# Altium PCB qol56-pcb(1).PcbDoc (part 2 of 2)
Units mm, origin at the board's own origin, x right, y up, seen from the top; angles counter-clockwise.
Board outline 272 x 86 mm, 2 copper layers (F.Cu, B.Cu); 180 components, 134 nets, 1209 pads, 192 vias.
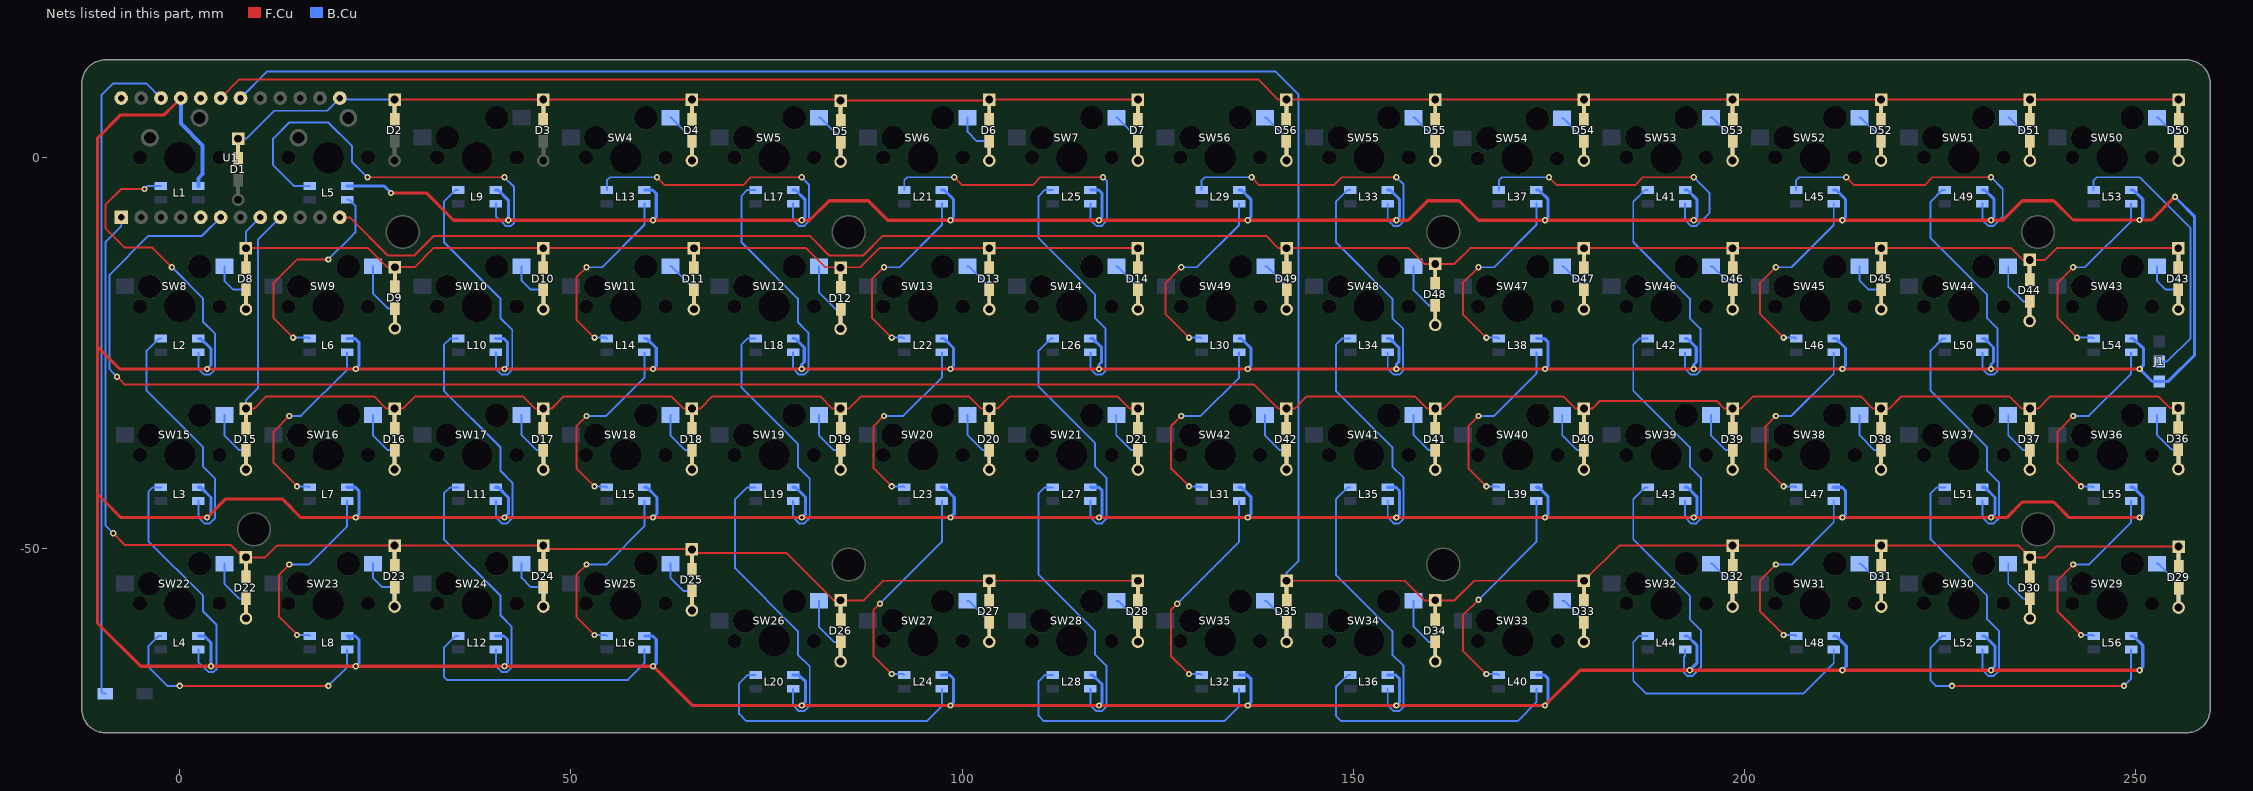
[diagram p2: the nets of this part, all layers, seen from the top]

## Via types
v1: diameter 0.8, hole 0.4, F.Cu to B.Cu, tented both sides, 192 vias

## Nets (pads, with @x,y where several pads share a name; then routed paths per layer and width w, separated by ;. In a path a pad name is that pad's centre, name@x,y a point inside that pad or via, vN(x,y) a via of type N, cw(c..) or ccw(c..) an arc to the next point about the centre after c; other vN are vias at no path point) (continued)
Net-(D4-Pad2): D4.2 SW4.2 | length 4.2
  B.Cu w0.25: SW4.2@62.7,5.12 62.85,5.12 65.47,2.5 D4.2@65.47,2.13
Net-(D5-Pad2): D5.2 SW5.2 | length 4.4
  B.Cu w0.25: SW5.2@81.7,5.12 81.85,5.12 84.47,2.5 D5.2@84.47,2
Net-(D6-Pad2): D6.2 SW6.2 | length 5.1
  B.Cu w0.25: SW6.2@100.7,5.12 100.7,3.3 101.87,2.13 102.62,2.13 D6.2@103.47,2.13
Net-(D7-Pad2): D7.2 SW7.2 | length 4.2
  B.Cu w0.25: SW7.2@119.7,5.12 119.85,5.12 122.47,2.5 D7.2@122.47,2.13
Net-(D8-Pad2): D8.2 SW8.2 | length 5.1
  B.Cu w0.25: SW8.2@5.7,-13.88 5.7,-15.7 6.87,-16.87 7.62,-16.87 D8.2@8.47,-16.87
Net-(D9-Pad2): D9.2 SW9.2 | length 7.1
  B.Cu w0.25: SW9.2@24.7,-13.88 24.7,-17.35 26.65,-19.3 D9.2@27.5,-19.3
Net-(D10-Pad2): D10.2 SW10.2 | length 5.1
  B.Cu w0.25: SW10.2@43.7,-13.88 43.7,-15.7 44.87,-16.87 45.62,-16.87 D10.2@46.47,-16.87
Net-(D11-Pad2): D11.2 SW11.2 | length 4.3
  B.Cu w0.25: SW11.2@62.7,-13.88 62.85,-13.88 65.72,-16.75 D11.2@65.72,-16.87
Net-(D12-Pad2): D12.2 SW12.2 | length 8
  B.Cu w0.25: SW12.2@81.7,-13.88 81.7,-17.2 83.87,-19.37 D12.2@84.47,-19.37 ; D12.2@84.47,-20 D12.2@84.47,-18.97
Net-(D13-Pad2): D13.2 SW13.2 | length 4.2
  B.Cu w0.25: SW13.2@100.7,-13.88 100.85,-13.88 103.47,-16.5 D13.2@103.47,-16.87
Net-(D14-Pad2): D14.2 SW14.2 | length 4.2
  B.Cu w0.25: SW14.2@119.7,-13.88 119.85,-13.88 122.47,-16.5 D14.2@122.47,-16.87
Net-(D15-Pad2): D15.2 SW15.2 | length 6.1
  B.Cu w0.25: SW15.2@5.7,-32.88 5.7,-35.45 7.62,-37.37 D15.2@8.47,-37.37
Net-(D16-Pad2): D16.2 SW16.2 | length 6.1
  B.Cu w0.25: SW16.2@24.7,-32.88 24.7,-35.45 26.62,-37.37 D16.2@27.47,-37.37
Net-(D17-Pad2): D17.2 SW17.2 | length 6.1
  B.Cu w0.25: SW17.2@43.7,-32.88 43.7,-35.45 45.62,-37.37 D17.2@46.47,-37.37
Net-(D18-Pad2): D18.2 SW18.2 | length 6.1
  B.Cu w0.25: SW18.2@62.7,-32.88 62.7,-35.45 64.62,-37.37 D18.2@65.47,-37.37
Net-(D19-Pad2): D19.2 SW19.2 | length 6.1
  B.Cu w0.25: SW19.2@81.7,-32.88 81.7,-35.45 83.62,-37.37 D19.2@84.47,-37.37
Net-(D20-Pad2): D20.2 SW20.2 | length 6.1
  B.Cu w0.25: SW20.2@100.7,-32.88 100.7,-35.45 102.62,-37.37 D20.2@103.47,-37.37
Net-(D21-Pad2): D21.2 SW21.2 | length 6.1
  B.Cu w0.25: SW21.2@119.7,-32.88 119.7,-35.45 121.62,-37.37 D21.2@122.47,-37.37
Net-(D22-Pad2): D22.2 SW22.2 | length 6.1
  B.Cu w0.25: SW22.2@5.7,-51.88 5.7,-54.45 7.62,-56.37 D22.2@8.47,-56.37
Net-(D23-Pad2): D23.2 SW23.2 | length 5.1
  B.Cu w0.25: SW23.2@24.7,-51.88 24.7,-53.7 25.87,-54.87 D23.2@27.47,-54.87
Net-(D24-Pad2): D24.2 SW24.2 | length 5.1
  B.Cu w0.25: SW24.2@43.7,-51.88 43.7,-53.7 44.87,-54.87 D24.2@46.47,-54.87
Net-(D25-Pad2): D25.2 SW25.2 | length 5.3
  B.Cu w0.25: SW25.2@62.7,-51.88 62.7,-53.7 64.37,-55.37 D25.2@65.47,-55.37
Net-(D26-Pad2): D26.2 SW26.2 | length 6.9
  B.Cu w0.25: SW26.2@81.7,-56.63 81.7,-59.95 83.62,-61.87 D26.2@84.47,-61.87
Net-(D27-Pad2): D27.2 SW27.2 | length 4
  B.Cu w0.25: SW27.2@100.7,-56.63 100.85,-56.63 103.47,-59.25 D27.2@103.47,-59.37
Net-(D28-Pad2): D28.2 SW28.2 | length 4
  B.Cu w0.25: SW28.2@119.7,-56.63 119.93,-56.63 122.47,-59.17 D28.2@122.47,-59.37
Net-(D29-Pad2): D29.2 SW29.2 | length 4.4
  B.Cu w0.25: SW29.2@252.7,-51.88 252.85,-51.88 255.47,-54.5 D29.2@255.47,-55
Net-(D30-Pad2): D30.2 SW30.2 | length 6.1
  B.Cu w0.25: SW30.2@233.7,-51.88 233.7,-54.45 235.62,-56.37 D30.2@236.47,-56.37
Net-(D31-Pad2): D31.2 SW31.2 | length 4.2
  B.Cu w0.25: SW31.2@214.7,-51.88 214.85,-51.88 217.47,-54.5 D31.2@217.47,-54.87
Net-(D32-Pad2): D32.2 SW32.2 | length 4.2
  B.Cu w0.25: SW32.2@195.7,-51.88 195.85,-51.88 198.47,-54.5 D32.2@198.47,-54.87
Net-(D33-Pad2): D33.2 SW33.2 | length 4
  B.Cu w0.25: SW33.2@176.7,-56.63 176.93,-56.63 179.47,-59.17 D33.2@179.47,-59.37
Net-(D34-Pad2): D34.2 SW34.2 | length 6.9
  B.Cu w0.25: SW34.2@157.7,-56.63 157.7,-59.95 159.62,-61.87 D34.2@160.47,-61.87
Net-(D35-Pad2): D35.2 SW35.2 | length 5.1
  B.Cu w0.25: SW35.2@138.7,-56.63 138.85,-56.63 141.47,-59.25 D35.2@141.47,-60.47
Net-(D36-Pad2): D36.2 SW36.2 | length 6.1
  B.Cu w0.25: SW36.2@252.7,-32.88 252.7,-35.41 254.59,-37.3 D36.2@255.44,-37.3
Net-(D37-Pad2): D37.2 SW37.2 | length 6.1
  B.Cu w0.25: SW37.2@233.7,-32.88 233.7,-35.45 235.62,-37.37 D37.2@236.47,-37.37
Net-(D38-Pad2): D38.2 SW38.2 | length 6.1
  B.Cu w0.25: SW38.2@214.7,-32.88 214.7,-35.479 216.59,-37.37 D38.2@217.44,-37.37
Net-(D39-Pad2): D39.2 SW39.2 | length 6.1
  B.Cu w0.25: SW39.2@195.7,-32.88 195.7,-35.45 197.62,-37.37 D39.2@198.47,-37.37
Net-(D40-Pad2): D40.2 SW40.2 | length 6.1
  B.Cu w0.25: SW40.2@176.7,-32.88 176.7,-35.45 178.62,-37.37 D40.2@179.47,-37.37
Net-(D41-Pad2): D41.2 SW41.2 | length 6.1
  B.Cu w0.25: SW41.2@157.7,-32.88 157.7,-35.45 159.62,-37.37 D41.2@160.47,-37.37
Net-(D42-Pad2): D42.2 SW42.2 | length 6.1
  B.Cu w0.25: SW42.2@138.7,-32.88 138.7,-35.479 140.59,-37.37 D42.2@141.44,-37.37
Net-(D43-Pad2): D43.2 SW43.2 | length 5.1
  B.Cu w0.25: SW43.2@252.7,-13.88 252.7,-15.729 253.84,-16.87 254.59,-16.87 D43.2@255.44,-16.87
Net-(D44-Pad2): D44.2 SW44.2 | length 6.1
  B.Cu w0.25: SW44.2@233.7,-13.88 233.7,-16.479 235.59,-18.37 D44.2@236.44,-18.37
Net-(D45-Pad2): D45.2 SW45.2 | length 5.1
  B.Cu w0.25: SW45.2@214.7,-13.88 214.7,-15.7 215.87,-16.87 216.62,-16.87 D45.2@217.47,-16.87
Net-(D46-Pad2): D46.2 SW46.2 | length 4.2
  B.Cu w0.25: SW46.2@195.7,-13.88 195.85,-13.88 198.47,-16.5 D46.2@198.47,-16.87
Net-(D47-Pad2): D47.2 SW47.2 | length 4.2
  B.Cu w0.25: SW47.2@176.7,-13.88 176.85,-13.88 179.47,-16.5 D47.2@179.47,-16.87
Net-(D48-Pad2): D48.2 SW48.2 | length 6.6
  B.Cu w0.25: SW48.2@157.7,-13.88 157.7,-16.95 159.62,-18.87 D48.2@160.47,-18.87
Net-(D49-Pad2): D49.2 SW49.2 | length 4.2
  B.Cu w0.25: SW49.2@138.78,-13.88 138.93,-13.88 141.47,-16.42 D49.2@141.47,-16.87
Net-(D50-Pad2): D50.2 SW50.2 | length 4.2
  B.Cu w0.25: SW50.2@252.7,5.12 252.85,5.12 255.47,2.5 D50.2@255.47,2.13
Net-(D51-Pad2): D51.2 SW51.2 | length 4.2
  B.Cu w0.25: SW51.2@233.7,5.12 233.85,5.12 236.47,2.5 D51.2@236.47,2.13
Net-(D52-Pad2): D52.2 SW52.2 | length 4.2
  B.Cu w0.25: SW52.2@214.7,5.12 214.85,5.12 217.44,2.53 D52.2@217.44,2.13
Net-(D53-Pad2): D53.2 SW53.2 | length 4.2
  B.Cu w0.25: SW53.2@195.7,5.12 195.85,5.12 198.47,2.5 D53.2@198.47,2.13
Net-(D54-Pad2): D54.2 SW54.2 | length 4.2
  B.Cu w0.25: SW54.2@176.66,5.04 176.81,5.04 179.47,2.38 D54.2@179.47,2.13
Net-(D55-Pad2): D55.2 SW55.2 | length 4.2
  B.Cu w0.25: SW55.2@157.7,5.12 157.85,5.12 160.47,2.5 D55.2@160.47,2.13
Net-(D56-Pad2): D56.2 SW56.2 | length 4.2
  B.Cu w0.25: SW56.2@138.7,5.12 138.85,5.12 141.44,2.53 D56.2@141.44,2.13
Net-(J1-Pad2): J1.2 L53.1 | length 35.8
  B.Cu w0.25: L53.1@244.6,-4.125 244.6,-2.9 245,-2.5 250.5,-2.5 257,-9 257,-23.052 254.012,-26.04 J1.2@253,-26.04
Net-(L1-Pad1): L1.1 L2.3 | length 41.8
  F.Cu w0.25: v1(-4.5,-4) -7.5,-4 -9.5,-6 -9.5,-9 -7,-11.5 -3.5,-11.5 v1(-1,-14)
  B.Cu w0.25: v1(-4.5,-4) -4.125,-3.625 L1.1@-2.4,-3.625 ; v1(-1,-14) -0.6,-14.4 3,-18 3,-21 4.525,-22.525 4.525,-27.048 3.848,-27.725 3.152,-27.725 2.4,-26.973 L2.3@2.4,-24.875
Net-(L2-Pad1): L2.1 L3.3 | length 32.3
  B.Cu w0.25: L2.1@-2.4,-23.125 -2.7,-23.125 -4.225,-24.65 -4.225,-29.775 3,-37 3,-39.5 4.525,-41.025 4.525,-46.048 3.848,-46.725 3.152,-46.725 2.4,-45.973 2.4,-44.625 L3.3@2.4,-43.875
Net-(L3-Pad1): L3.1 L4.3 | length 32.7
  B.Cu w0.25: L3.1@-2.4,-42.125 -3.45,-42.125 -4,-42.675 -4,-49 3,-56 3,-58 4.725,-59.725 4.725,-65.348 4.348,-65.725 3.652,-65.725 2.4,-64.473 L4.3@2.4,-62.875
Net-(L4-Pad1): L4.1 L8.3 | length 34.4
  F.Cu w0.25: v1(0,-67.5) v1(19,-67.5)
  B.Cu w0.25: L4.1@-2.4,-61.125 -2.7,-61.125 -4,-62.425 -4,-65.073 -1.573,-67.5 v1(0,-67.5) ; v1(19,-67.5) 21.4,-65.1 L8.3@21.4,-62.875
Net-(L5-Pad1): L5.1 L9.3 | length 54.6
  F.Cu w0.25: v1(24,-2.5) 35,-2.5 v1(41.5,-2.5)
  B.Cu w0.25: L5.1@16.6,-3.625 14.625,-3.625 11.95,-0.95 11.95,2.45 14,4.5 19,4.5 22,1.5 22,-0.5 v1(24,-2.5) ; L9.3@40.4,-5.875 40.4,-7.473 41.652,-8.725 42.348,-8.725 42.725,-8.348 42.725,-3.725 v1(41.5,-2.5)
Net-(L5-Pad3): L5.3 L6.1 | length 28.1
  F.Cu w0.25: v1(14.5,-23) 12,-20.5 12,-16 15,-13 v1(19,-13)
  B.Cu w0.25: v1(14.5,-23) 16.475,-23 L6.1@16.6,-23.125 ; v1(19,-13) 21.671,-10.329 22.45,-9.55 22.45,-6.125 21.7,-5.375 L5.3@21.4,-5.375
Net-(L6-Pad3): L6.3 L7.1 | length 24.8
  F.Cu w0.25: v1(14,-33) 12,-35 12,-39 v1(15,-42)
  B.Cu w0.25: v1(14,-33) 15.5,-33 21.4,-27.1 L6.3@21.4,-24.875 ; v1(15,-42) 16.475,-42 L7.1@16.6,-42.125
Net-(L7-Pad3): L7.3 L8.1 | length 24.8
  F.Cu w0.25: v1(14,-52) 12.695,-53.305 12.695,-58.695 v1(15,-61)
  B.Cu w0.25: v1(14,-52) 16.5,-52 21.4,-47.1 L7.3@21.4,-43.875 ; v1(15,-61) 16.475,-61 L8.1@16.6,-61.125
Net-(L10-Pad1): L10.1 L11.3 | length 32.7
  B.Cu w0.25: L10.1@35.6,-23.125 34.55,-23.125 33.775,-23.9 33.775,-29.775 41,-37 41,-40 42.525,-41.525 42.525,-46.048 41.848,-46.725 41.152,-46.725 40.4,-45.973 40.4,-44.625 L11.3@40.4,-43.875
Net-(L10-Pad3): L9.1 L10.3 | length 32.3
  B.Cu w0.25: L9.1@35.6,-4.125 35.3,-4.125 33.775,-5.65 33.775,-10.775 41,-18 41,-20.5 42.5,-22 42.5,-27.073 41.848,-27.725 41.152,-27.725 40.4,-26.973 40.4,-25.625 L10.3@40.4,-24.875
Net-(L11-Pad1): L11.1 L12.3 | length 32.7
  B.Cu w0.25: L11.1@35.6,-42.125 34.55,-42.125 33.775,-42.9 33.775,-48.775 41,-56 41,-58.5 42.425,-59.925 42.425,-65.148 41.848,-65.725 41.152,-65.725 40.4,-64.973 L12.3@40.4,-62.875
Net-(L12-Pad1): L12.1 L16.3 | length 34.5
  B.Cu w0.25: L12.1@35.6,-61.125 35.3,-61.125 33.775,-62.65 33.775,-66.348 34.152,-66.725 57.275,-66.725 59.4,-64.6 L16.3@59.4,-62.875
Net-(L13-Pad1): L13.1 L17.3 | length 37.8
  F.Cu w0.25: v1(61,-2.5) 62,-3.5 72,-3.5 73,-2.5 v1(79.5,-2.5)
  B.Cu w0.25: L13.1@54.6,-4.125 54.6,-2.9 55,-2.5 v1(61,-2.5) ; L17.3@78.4,-5.875 78.4,-6.625 78.4,-7.973 79.152,-8.725 79.848,-8.725 80.425,-8.148 80.425,-3.425 v1(79.5,-2.5)
Net-(L13-Pad3): L13.3 L14.1 | length 24.5
  F.Cu w0.25: v1(52,-14) 50.695,-15.305 50.695,-20.695 v1(53,-23)
  B.Cu w0.25: v1(52,-14) 54,-14 59.4,-8.6 L13.3@59.4,-5.875 ; v1(53,-23) 54.475,-23 L14.1@54.6,-23.125
Net-(L14-Pad3): L14.3 L15.1 | length 24.8
  F.Cu w0.25: v1(52,-33) 50.695,-34.305 50.695,-39.695 v1(53,-42)
  B.Cu w0.25: v1(52,-33) 54.5,-33 59.4,-28.1 L14.3@59.4,-24.875 ; v1(53,-42) 54.475,-42 L15.1@54.6,-42.125
Net-(L15-Pad3): L15.3 L16.1 | length 24.8
  F.Cu w0.25: v1(52,-52) 50.695,-53.305 50.695,-58.695 v1(53,-61)
  B.Cu w0.25: v1(52,-52) 54.5,-52 59.4,-47.1 L15.3@59.4,-43.875 ; v1(53,-61) 54.475,-61 L16.1@54.6,-61.125
Net-(L17-Pad1): L17.1 L18.3 | length 32.6
  B.Cu w0.25: L17.1@73.6,-4.125 72.55,-4.125 71.775,-4.9 71.775,-10.775 79,-18 79,-21 80.35,-22.35 80.35,-27.223 79.848,-27.725 79.152,-27.725 78.4,-26.973 78.4,-25.625 L18.3@78.4,-24.875
Net-(L18-Pad1): L18.1 L19.3 | length 32.7
  B.Cu w0.25: L18.1@73.6,-23.125 72.55,-23.125 71.775,-23.9 71.775,-29.332 79,-36.557 79,-39.5 80.525,-41.025 80.525,-46.048 79.848,-46.725 79.152,-46.725 78.4,-45.973 78.4,-44.625 L19.3@78.4,-43.875
Net-(L19-Pad1): L19.1 L20.3 | length 38.4
  B.Cu w0.25: L19.1@73.6,-42.125 72.55,-42.125 71,-43.675 71,-52.5 79,-60.5 79,-63.5 80.525,-65.025 80.525,-70.048 79.848,-70.725 79.152,-70.725 78.4,-69.973 L20.3@78.4,-67.875
Net-(L20-Pad1): L20.1 L24.3 | length 35.7
  B.Cu w0.25: L20.1@73.6,-66.125 72.55,-66.125 71.5,-67.175 71.5,-71.073 72.427,-72 95.5,-72 97.4,-70.1 L24.3@97.4,-67.875
Net-(L21-Pad1): L21.1 L25.3 | length 38.2
  F.Cu w0.25: v1(99,-2.5) 100,-3.5 109,-3.5 110,-2.5 v1(118,-2.5)
  B.Cu w0.25: L21.1@92.6,-4.125 92.6,-2.9 93,-2.5 v1(99,-2.5) ; L25.3@116.4,-5.875 116.4,-7.973 117.152,-8.725 117.848,-8.725 118.5,-8.073 118.5,-3 118.4,-2.9 v1(118,-2.5)
Net-(L21-Pad3): L21.3 L22.1 | length 24.7
  F.Cu w0.25: v1(90,-14) 88.5,-15.5 88.5,-20.5 v1(91,-23)
  B.Cu w0.25: v1(90,-14) 92,-14 97.4,-8.6 L21.3@97.4,-5.875 ; v1(91,-23) 92.475,-23 L22.1@92.6,-23.125
Net-(L22-Pad3): L22.3 L23.1 | length 24.8
  F.Cu w0.25: v1(90,-33) 88.695,-34.305 88.695,-39.695 v1(91,-42)
  B.Cu w0.25: v1(90,-33) 92.5,-33 97.4,-28.1 L22.3@97.4,-24.875 ; v1(91,-42) 92.475,-42 L23.1@92.6,-42.125
Net-(L23-Pad3): L23.3 L24.1 | length 28.3
  F.Cu w0.25: v1(89.5,-57) 88.695,-57.805 88.695,-63.695 v1(91,-66)
  B.Cu w0.25: v1(89.5,-57) 97.4,-49.1 L23.3@97.4,-43.875 ; v1(91,-66) 92.475,-66 L24.1@92.6,-66.125
Net-(L25-Pad1): L25.1 L26.3 | length 32.6
  B.Cu w0.25: L25.1@111.6,-4.125 110.55,-4.125 109.775,-4.9 109.775,-10.275 117,-17.5 117,-20.5 118.35,-21.85 118.35,-27.223 117.848,-27.725 117.152,-27.725 116.4,-26.973 116.4,-25.625 L26.3@116.4,-24.875
Net-(L26-Pad1): L26.1 L27.3 | length 32.2
  B.Cu w0.25: L26.1@111.6,-23.125 111.3,-23.125 109.775,-24.65 109.775,-29.275 117,-36.5 117,-39.5 118.425,-40.925 118.425,-46.148 117.848,-46.725 117.152,-46.725 116.4,-45.973 116.4,-44.625 L27.3@116.4,-43.875
Net-(L27-Pad1): L27.1 L28.3 | length 37.7
  B.Cu w0.25: L27.1@111.6,-42.125 110.55,-42.125 109.775,-42.9 109.775,-53.275 117,-60.5 117,-63.5 118.425,-64.925 118.425,-70.148 117.848,-70.725 117.152,-70.725 116.4,-69.973 116.4,-68.625 L28.3@116.4,-67.875
Net-(L28-Pad1): L28.1 L32.3 | length 35.5
  B.Cu w0.25: L28.1@111.6,-66.125 110.55,-66.125 109.775,-66.9 109.775,-71.348 110.427,-72 133.5,-72 135.4,-70.1 L32.3@135.4,-67.875
Net-(L29-Pad1): L29.1 L33.3 | length 37.8
  F.Cu w0.25: v1(137,-2.5) 138,-3.5 147.5,-3.5 148.5,-2.5 v1(155.5,-2.5)
  B.Cu w0.25: L29.1@130.6,-4.125 130.6,-2.9 131,-2.5 v1(137,-2.5) ; L33.3@154.4,-5.875 154.4,-6.625 154.4,-7.973 155.152,-8.725 155.848,-8.725 156.425,-8.148 156.425,-3.425 v1(155.5,-2.5)
Net-(L29-Pad3): L29.3 L30.1 | length 25.1
  F.Cu w0.25: v1(128,-14) 126,-16 126,-20 v1(129,-23)
  B.Cu w0.25: v1(128,-14) 130,-14 135.4,-8.6 L29.3@135.4,-5.875 ; v1(129,-23) 130.475,-23 L30.1@130.6,-23.125
Net-(L30-Pad3): L30.3 L31.1 | length 24.8
  F.Cu w0.25: v1(128,-33) 126.695,-34.305 126.695,-39.695 v1(129,-42)
  B.Cu w0.25: v1(128,-33) 130.5,-33 135.4,-28.1 L30.3@135.4,-24.875 ; v1(129,-42) 130.475,-42 L31.1@130.6,-42.125
Net-(L31-Pad3): L31.3 L32.1 | length 28.3
  F.Cu w0.25: v1(127.5,-57) 126.695,-57.805 126.695,-63.695 v1(129,-66)
  B.Cu w0.25: v1(127.5,-57) 135.4,-49.1 L31.3@135.4,-43.875 ; v1(129,-66) 130.475,-66 L32.1@130.6,-66.125
Net-(L33-Pad1): L33.1 L34.3 | length 32.1
  B.Cu w0.25: L33.1@149.6,-4.125 149.3,-4.125 147.775,-5.65 147.775,-10.775 155,-18 155,-20.5 156.35,-21.85 156.35,-27.223 155.848,-27.725 155.152,-27.725 154.4,-26.973 154.4,-25.625 L34.3@154.4,-24.875
Net-(L34-Pad1): L34.1 L35.3 | length 32.7
  B.Cu w0.25: L34.1@149.6,-23.125 148.55,-23.125 147.775,-23.9 147.775,-29.775 155,-37 155,-39.5 156.425,-40.925 156.425,-46.148 155.848,-46.725 155.152,-46.725 154.4,-45.973 154.4,-44.625 L35.3@154.4,-43.875
Net-(L35-Pad1): L35.1 L36.3 | length 37.2
  B.Cu w0.25: L35.1@149.6,-42.125 149.3,-42.125 147.775,-43.65 147.775,-53.275 155,-60.5 155,-63.5 156.425,-64.925 156.425,-70.148 155.848,-70.725 155.152,-70.725 154.4,-69.973 154.4,-68.625 L36.3@154.4,-67.875
Net-(L36-Pad1): L36.1 L40.3 | length 34.8
  B.Cu w0.25: L36.1@149.6,-66.125 149.3,-66.125 147.775,-67.65 147.775,-71.348 148.427,-72 171,-72 173.4,-69.6 L40.3@173.4,-67.875
Net-(L37-Pad1): L37.1 L41.3 | length 38.7
  F.Cu w0.25: v1(175,-2.5) 176,-3.5 186,-3.5 187,-2.5 v1(193.5,-2.5)
  B.Cu w0.25: L37.1@168.6,-4.125 168.6,-2.9 169,-2.5 v1(175,-2.5) ; L41.3@192.4,-5.875 192.4,-6.625 192.4,-7.973 193.152,-8.725 193.848,-8.725 195.5,-7.073 195.5,-4.5 v1(193.5,-2.5)
Net-(L37-Pad3): L37.3 L38.1 | length 25.1
  F.Cu w0.25: v1(166,-14) 164,-16 164,-20 v1(167,-23)
  B.Cu w0.25: v1(166,-14) 168,-14 173.4,-8.6 L37.3@173.4,-5.875 ; v1(167,-23) 168.475,-23 L38.1@168.6,-23.125
Net-(L38-Pad3): L38.3 L39.1 | length 24.5
  F.Cu w0.25: v1(166,-33) 164.695,-34.305 164.695,-39.695 v1(167,-42)
  B.Cu w0.25: v1(166,-33) 168,-33 173.4,-27.6 L38.3@173.4,-24.875 ; v1(167,-42) 168.475,-42 L39.1@168.6,-42.125
Net-(L39-Pad3): L39.3 L40.1 | length 28.9
  F.Cu w0.25: v1(166,-56.5) 164,-58.5 164,-63 v1(167,-66)
  B.Cu w0.25: v1(166,-56.5) 173.4,-49.1 L39.3@173.4,-43.875 ; v1(167,-66) 168.475,-66 L40.1@168.6,-66.125
Net-(L41-Pad1): L41.1 L42.3 | length 32.1
  B.Cu w0.25: L41.1@187.6,-4.125 187.3,-4.125 185.775,-5.65 185.775,-10.775 193,-18 193,-20.5 194.35,-21.85 194.35,-27.223 193.848,-27.725 193.152,-27.725 192.4,-26.973 192.4,-25.625 L42.3@192.4,-24.875
Net-(L42-Pad1): L42.1 L43.3 | length 32.7
  B.Cu w0.25: L42.1@187.6,-23.125 186.55,-23.125 185.775,-23.9 185.775,-29.775 193,-37 193,-39.5 194.425,-40.925 194.425,-46.148 193.848,-46.725 193.152,-46.725 192.4,-45.973 192.4,-44.625 L43.3@192.4,-43.875
Net-(L43-Pad1): L43.1 L44.3 | length 33.3
  B.Cu w0.25: L43.1@187.6,-42.125 187.3,-42.125 185.775,-43.65 185.775,-48.775 193,-56 193,-59 194.425,-60.425 194.425,-65.148 193.348,-66.225 192.652,-66.225 192.275,-65.848 192.275,-63.75 192.4,-63.625 L44.3@192.4,-62.875
Net-(L44-Pad1): L44.1 L48.3 | length 36.7
  B.Cu w0.25: L44.1@187.6,-61.125 186.55,-61.125 185.775,-61.9 185.775,-66.848 187.427,-68.5 207.5,-68.5 211.4,-64.6 L48.3@211.4,-62.875
Net-(L45-Pad1): L45.1 L49.3 | length 38.3
  F.Cu w0.25: v1(213,-2.5) 214,-3.5 223,-3.5 224,-2.5 v1(231.5,-2.5)
  B.Cu w0.25: L45.1@206.6,-4.125 206.6,-2.9 207,-2.5 v1(213,-2.5) ; L49.3@230.4,-5.875 230.4,-6.625 230.4,-7.973 231.152,-8.725 231.848,-8.725 233,-7.573 233,-4 v1(231.5,-2.5)
Net-(L45-Pad3): L45.3 L46.1 | length 25.1
  F.Cu w0.25: v1(204,-14) 202,-16 202,-20 v1(205,-23)
  B.Cu w0.25: v1(204,-14) 206,-14 211.4,-8.6 L45.3@211.4,-5.875 ; v1(205,-23) 206.475,-23 L46.1@206.6,-23.125
Net-(L46-Pad3): L46.3 L47.1 | length 24.5
  F.Cu w0.25: v1(204,-33) 202.695,-34.305 202.695,-39.695 v1(205,-42)
  B.Cu w0.25: v1(204,-33) 206,-33 211.4,-27.6 L46.3@211.4,-24.875 ; v1(205,-42) 206.475,-42 L47.1@206.6,-42.125
Net-(L47-Pad3): L47.3 L48.1 | length 25.1
  F.Cu w0.25: v1(204,-52) 202,-54 202,-58 v1(205,-61)
  B.Cu w0.25: v1(204,-52) 206,-52 211.4,-46.6 L47.3@211.4,-43.875 ; v1(205,-61) 206.475,-61 L48.1@206.6,-61.125
Net-(L49-Pad1): L49.1 L50.3 | length 32.1
  B.Cu w0.25: L49.1@225.6,-4.125 225.3,-4.125 223.775,-5.65 223.775,-10.275 231,-17.5 231,-20.5 232.35,-21.85 232.35,-27.223 231.848,-27.725 231.152,-27.725 230.4,-26.973 L50.3@230.4,-24.875
Net-(L50-Pad1): L50.1 L51.3 | length 32.3
  B.Cu w0.25: L50.1@225.6,-23.125 225.3,-23.125 223.775,-24.65 223.775,-29.775 231,-37 231,-40 232.525,-41.525 232.525,-46.048 231.848,-46.725 231.152,-46.725 230.4,-45.973 230.4,-44.625 L51.3@230.4,-43.875
Net-(L51-Pad1): L51.1 L52.3 | length 33.7
  B.Cu w0.25: L51.1@225.6,-42.125 224.55,-42.125 223.775,-42.9 223.775,-48.775 231,-56 231,-59 232.525,-60.525 232.525,-65.548 231.848,-66.225 231.152,-66.225 230.4,-65.473 230.4,-63.625 L52.3@230.4,-62.875
Net-(L52-Pad1): L52.1 L56.3 | length 36.6
  F.Cu w0.25: v1(226.5,-67.5) v1(248.5,-67.5)
  B.Cu w0.25: L52.1@225.6,-61.125 225.3,-61.125 223.775,-62.65 223.775,-66.848 224.427,-67.5 v1(226.5,-67.5) ; v1(248.5,-67.5) 249.4,-66.6 L56.3@249.4,-62.875
Net-(L53-Pad3): L53.3 L54.1 | length 25.1
  F.Cu w0.25: v1(242,-14) 241.6,-14.4 240,-16 240,-20.5 v1(242.5,-23)
  B.Cu w0.25: v1(242,-14) 243.5,-14 249.4,-8.1 L53.3@249.4,-5.875 ; v1(242.5,-23) 244.475,-23 L54.1@244.6,-23.125
Net-(L54-Pad3): L54.3 L55.1 | length 25.1
  F.Cu w0.25: v1(242,-33) 240,-35 240,-39 v1(243,-42)
  B.Cu w0.25: v1(242,-33) 244,-33 249.4,-27.6 L54.3@249.4,-24.875 ; v1(243,-42) 244.475,-42 L55.1@244.6,-42.125
Net-(L55-Pad3): L55.3 L56.1 | length 25.1
  F.Cu w0.25: v1(242,-52) 240,-54 240,-58 v1(243,-61)
  B.Cu w0.25: v1(242,-52) 244,-52 249.4,-46.6 L55.3@249.4,-43.875 ; v1(243,-61) 244.475,-61 L56.1@244.6,-61.125
Net-(U1-Pad5): U1.5 | length 0.2
  F.Cu w0.25: U1.5@2.54,-7.47 U1.5@2.69,-7.62
Net-(U1-Pad20): U1.20
Net-(U1-Pad24): U1.24
reset: SW57.1 U1.22 | length 85.9
  B.Cu w0.25: SW57.1@-9.5,-68.5 -9.75,-68.5 -10,-68.25 -10,8 -8.5,9.5 -4.27,9.5 U1.22@-2.39,7.62
row0: D1.1 D2.1 D3.1 D4.1 D5.1 D6.1 D7.1 U1.13 | length 117.3
  F.Cu w0.25: D2.1@27.47,7.43 28.47,7.43 D3.1@46.47,7.43 D4.1@65.47,7.43 84.34,7.43 D5.1@84.47,7.3 103.34,7.3 D6.1@103.47,7.43 D7.1@122.47,7.43
  B.Cu w0.25: D1.1@7.47,2.43 8.52,2.43 12.09,6 18.85,6 U1.13@20.47,7.62 20.66,7.43 D2.1@27.47,7.43
row1: D8.1 D9.1 D10.1 D11.1 D12.1 D13.1 D14.1 U1.8 | length 122.7
  F.Cu w0.25: D8.1@8.47,-11.57 24.07,-11.57 26.5,-14 D9.1@27.5,-14 27.529,-13.971 30.029,-13.971 32.43,-11.57 45.42,-11.57 D10.1@46.47,-11.57 D11.1@65.72,-11.57 66.77,-11.57 80.07,-11.57 82.5,-14 87,-14 89.43,-11.57 D13.1@103.47,-11.57 D14.1@122.47,-11.57
  B.Cu w0.25: D8.1@8.47,-11.57 8.47,-9.46 U1.8@10.31,-7.62
row2: D15.1 D16.1 D17.1 D18.1 D19.1 D20.1 D21.1 U1.9 | length 148.1
  F.Cu w0.25: D15.1@8.47,-32.07 9.52,-32.07 11.09,-30.5 24.85,-30.5 26.42,-32.07 D16.1@27.47,-32.07 28.52,-32.07 30.09,-30.5 43.85,-30.5 45.42,-32.07 D17.1@46.47,-32.07 47.52,-32.07 49.09,-30.5 62.85,-30.5 64.42,-32.07 D18.1@65.47,-32.07 66.52,-32.07 68.09,-30.5 81.85,-30.5 83.42,-32.07 D19.1@84.47,-32.07 85.52,-32.07 87.09,-30.5 100.85,-30.5 102.42,-32.07 D20.1@103.47,-32.07 104.52,-32.07 106.09,-30.5 119.85,-30.5 121.42,-32.07 D21.1@122.47,-32.07
  B.Cu w0.25: D15.1@8.47,-32.07 8.47,-31.02 10,-29.49 10,-10.47 U1.9@12.85,-7.62
row3: D22.1 D23.1 D24.1 D25.1 D26.1 D27.1 D28.1 U1.1 | length 178.4
  F.Cu w0.25: v1(-8.5,-48) -7,-49.5 6.5,-49.5 8.07,-51.07 D22.1@8.47,-51.07 10.93,-51.07 12.43,-49.57 D23.1@27.47,-49.57 D24.1@46.47,-49.57 46.9,-50 65.4,-50 D25.1@65.47,-50.07 65.9,-50.5 77.5,-50.5 83.57,-56.57 87.43,-56.57 89.93,-54.07 D27.1@103.47,-54.07 D28.1@122.47,-54.07
  B.Cu w0.25: v1(-8.5,-48) -9,-47.5 -9.5,-47 -9.5,-10.776 -7.47,-8.746 U1.1@-7.47,-7.62
row4: D29.1 D30.1 D31.1 D32.1 D33.1 D34.1 D35.1 U1.18 | length 319.8
  F.Cu w0.25: D35.1@141.47,-54.07 142.52,-54.07 156.57,-54.07 159.07,-56.57 162.93,-56.57 165.43,-54.07 D33.1@179.47,-54.07 183.97,-49.57 D32.1@198.47,-49.57 D31.1@217.47,-49.57 235.07,-49.57 236.47,-50.97 D30.1@236.47,-51.07 238.43,-51.07 239.8,-49.7 254.42,-49.7 D29.1@255.47,-49.7
  B.Cu w0.25: U1.18@7.77,7.62 11.15,11 140.056,11 143,8.056 143,-51.49 141.47,-53.02 D35.1@141.47,-54.07
row5: D36.1 D37.1 D38.1 D39.1 D40.1 D41.1 D42.1 U1.6 | length 303.1
  F.Cu w0.25: v1(-8,-28) -7.6,-28.4 -7,-29 137.321,-29 140.39,-32.07 D42.1@141.44,-32.07 142.49,-32.07 144.06,-30.5 157.85,-30.5 159.42,-32.07 D41.1@160.47,-32.07 161.52,-32.07 163.09,-30.5 176.85,-30.5 178.42,-32.07 D40.1@179.47,-32.07 180.52,-32.07 181.495,-31.095 196.445,-31.095 197.42,-32.07 D39.1@198.47,-32.07 199.52,-32.07 201.09,-30.5 214.821,-30.5 216.39,-32.07 D38.1@217.44,-32.07 218.49,-32.07 220.06,-30.5 233.85,-30.5 235.42,-32.07 D37.1@236.47,-32.07 237.52,-32.07 239.09,-30.5 252.89,-30.5 254.39,-32 D36.1@255.44,-32
  B.Cu w0.25: v1(-8,-28) -8.4,-27.6 -9,-27 -9,-15 -4,-10 2.85,-10 U1.6@5.23,-7.62
row6: D43.1 D44.1 D45.1 D46.1 D47.1 D48.1 D49.1 U1.12 | length 243.6
  F.Cu w0.25: U1.12@20.47,-7.62 21.709,-7.62 26.589,-12.5 30,-12.5 32.5,-10 80.5,-10 83,-12.5 87.364,-12.5 89.864,-10 138.85,-10 140.42,-11.57 D49.1@141.47,-11.57 157.07,-11.57 159.07,-13.57 162.93,-13.57 164.93,-11.57 178.42,-11.57 D47.1@179.47,-11.57 D46.1@198.47,-11.57 D45.1@217.47,-11.57 234.07,-11.57 235.57,-13.07 D44.1@236.44,-13.07 238.43,-13.07 239.93,-11.57 254.39,-11.57 D43.1@255.44,-11.57
row7: D50.1 D51.1 D52.1 D53.1 D54.1 D55.1 D56.1 U1.19 | length 252.3
  F.Cu w0.25: U1.19@5.23,7.62 7.61,10 137.821,10 140.39,7.43 D56.1@141.44,7.43 D55.1@160.47,7.43 D54.1@179.47,7.43 D53.1@198.47,7.43 D52.1@217.44,7.43 D51.1@236.47,7.43 D50.1@255.47,7.43
VCC: J1.1 L1.4 L2.4 L3.4 L4.4 L5.4 L6.4 L7.4 L8.4 L9.4 L10.4 L11.4 L12.4 L13.4 L14.4 L15.4 L16.4 L17.4 L18.4 L19.4 L20.4 L21.4 L22.4 L23.4 L24.4 L25.4 L26.4 L27.4 L28.4 L29.4 L30.4 L31.4 L32.4 L33.4 L34.4 L35.4 L36.4 L37.4 L38.4 L39.4 L40.4 L41.4 L42.4 L43.4 L44.4 L45.4 L46.4 L47.4 L48.4 L49.4 L50.4 L51.4 L52.4 L53.4 L54.4 L55.4 L56.4 U1.21 | length 1427.9
  F.Cu w0.4: -10.5,-24 -10.5,-24.184 -7.684,-27 v1(3.5,-27) v1(22.5,-27) v1(41.5,-27) v1(60.5,-27) v1(79.5,-27) v1(98.5,-27) v1(117.5,-27) v1(136.5,-27) v1(155.5,-27) v1(174.5,-27) v1(193.5,-27) v1(212.5,-27) v1(231.5,-27) v1(250.5,-27) ; U1.21@0.15,7.62 -0.726,6.744 -1.995,5.475 -7.525,5.475 -10.5,2.5 -10.5,-43 ; v1(27,-4.5) 27.566,-4.5 31.5,-4.5 35,-8 v1(42,-8) v1(60.5,-8) v1(79.5,-8) 80.5,-8 83,-5.5 88,-5.5 90.5,-8 v1(98.5,-8) v1(117.5,-8) v1(136.5,-8) v1(155.5,-8) 157,-8 159.5,-5.5 163.5,-5.5 166,-8 v1(174.5,-8) v1(193.5,-8) v1(212.5,-8) v1(231.5,-8) 233,-8 235.5,-5.5 239.5,-5.5 241.971,-7.971 v1(250.471,-7.971) 252.029,-7.971 v1(255,-5) ; v1(250.5,-65.5) v1(231.5,-65.5) v1(212.5,-65.5) v1(193,-65.5) 179,-65.5 v1(174.5,-70) v1(155.5,-70) v1(136.5,-70) v1(117.5,-70) v1(98.5,-70) v1(79.5,-70) 65.5,-70 v1(60.5,-65) v1(41.5,-65) v1(22.5,-65) v1(4,-65) -5,-65 -10.5,-59.5 -10.5,-43 ; v1(250.5,-46) 241.5,-46 239.5,-44 235.5,-44 233.5,-46 v1(231.5,-46) v1(212.5,-46) v1(193.5,-46) v1(174.5,-46) v1(155.5,-46) v1(136.5,-46) v1(117.5,-46) v1(98.5,-46) v1(79.5,-46) v1(60.5,-46) v1(41.5,-46) v1(22.5,-46) 15.5,-46 13.1,-43.6 5.9,-43.6 3.9,-45.6 v1(3.5,-46) -7.5,-46 -10,-43.5 -10.5,-43
  B.Cu w0.4: L4.4@2.4,-61.125 3.125,-61.125 4,-62 v1(4,-65) ; L3.4@2.4,-42.125 2.7,-42.125 4,-43.425 4,-45.5 3.9,-45.6 v1(3.5,-46) ; L2.4@2.4,-23.125 2.7,-23.125 4,-24.425 4,-26.5 v1(3.5,-27) ; L7.4@21.4,-42.125 22.45,-42.125 22.9,-42.575 22.9,-45.6 v1(22.5,-46) ; L6.4@21.4,-23.125 22.45,-23.125 22.9,-23.575 22.9,-26.6 v1(22.5,-27) ; L5.4@21.4,-3.625 26.125,-3.625 v1(27,-4.5) ; L8.4@21.775,-61.5 L8.4@21.4,-61.125 22.45,-61.125 22.9,-61.575 22.9,-64.6 v1(22.5,-65) ; L12.4@40.4,-61.125 41.45,-61.125 41.9,-61.575 41.9,-64.6 v1(41.5,-65) ; L11.4@40.4,-42.125 40.7,-42.125 42,-43.425 42,-45.5 v1(41.5,-46) ; L10.4@40.4,-23.125 41.45,-23.125 41.9,-23.575 41.9,-26.6 v1(41.5,-27) ; L9.4@40.4,-4.125 40.7,-4.125 42,-5.425 v1(42,-8) ; L16.4@59.4,-61.125 60.45,-61.125 60.9,-61.575 60.9,-64.6 v1(60.5,-65) ; L15.4@59.4,-42.125 59.7,-42.125 61,-43.425 61,-45.5 v1(60.5,-46) ; L14.4@59.4,-23.125 59.7,-23.125 60.9,-24.325 60.9,-26.6 v1(60.5,-27) ; L13.4@59.4,-4.125 60.45,-4.125 60.9,-4.575 60.9,-7.6 v1(60.5,-8) ; L20.4@78.4,-66.125 79.125,-66.125 80,-67 80,-69.5 v1(79.5,-70) ; L19.4@78.4,-42.125 78.7,-42.125 80,-43.425 80,-45.5 v1(79.5,-46) ; L18.4@78.4,-23.125 78.7,-23.125 79.825,-24.25 79.825,-26.109 79.5,-26.434 v1(79.5,-27) ; L17.4@78.4,-4.125 78.7,-4.125 79.9,-5.325 79.9,-7.6 v1(79.5,-8) ; L24.4@97.4,-66.125 98.45,-66.125 98.9,-66.575 98.9,-69.6 v1(98.5,-70) ; L23.4@97.4,-42.125 97.7,-42.125 99,-43.425 99,-45.5 v1(98.5,-46) ; L22.4@97.4,-23.125 97.7,-23.125 98.9,-24.325 98.9,-26.6 v1(98.5,-27) ; L21.4@97.4,-4.125 97.7,-4.125 98.9,-5.325 98.9,-7.6 v1(98.5,-8) ; L28.4@116.4,-66.125 116.7,-66.125 117.9,-67.325 117.9,-69.6 v1(117.5,-70) ; L27.4@116.4,-42.125 117.45,-42.125 117.9,-42.575 117.9,-45.6 v1(117.5,-46) ; L26.4@116.4,-23.125 116.7,-23.125 117.825,-24.25 117.825,-26.109 117.5,-26.434 v1(117.5,-27) ; L25.4@116.4,-4.125 117.45,-4.125 117.9,-4.575 117.9,-7.6 v1(117.5,-8) ; L32.4@135.4,-66.125 136.45,-66.125 136.9,-66.575 136.9,-69.6 v1(136.5,-70) ; L31.4@135.4,-42.125 135.7,-42.125 136.9,-43.325 136.9,-45.6 v1(136.5,-46) ; L30.4@135.4,-23.125 135.7,-23.125 136.9,-24.325 136.9,-26.6 v1(136.5,-27) ; L29.4@135.4,-4.125 135.7,-4.125 136.9,-5.325 136.9,-7.6 v1(136.5,-8) ; L36.4@154.4,-66.125 155.45,-66.125 155.9,-66.575 155.9,-69.6 v1(155.5,-70) ; L35.4@154.4,-42.125 155.45,-42.125 155.9,-42.575 155.9,-45.6 v1(155.5,-46) ; L34.4@154.4,-23.125 154.7,-23.125 155.825,-24.25 155.825,-26.109 155.5,-26.434 v1(155.5,-27) ; L33.4@154.4,-4.125 154.7,-4.125 155.9,-5.325 155.9,-7.6 v1(155.5,-8) ; L40.4@173.4,-66.125 174.45,-66.125 174.9,-66.575 174.9,-69.6 v1(174.5,-70) ; L39.4@173.4,-42.125 173.7,-42.125 174.9,-43.325 174.9,-45.6 v1(174.5,-46) ; L38.4@173.4,-23.125 174.45,-23.125 174.9,-23.575 174.9,-26.6 v1(174.5,-27) ; L37.4@173.4,-4.125 173.7,-4.125 174.9,-5.325 174.9,-7.6 v1(174.5,-8) ; L44.4@192.4,-61.125 192.7,-61.125 193.9,-62.325 193.9,-64.6 v1(193,-65.5) ; L43.4@192.4,-42.125 192.7,-42.125 193.9,-43.325 193.9,-45.6 v1(193.5,-46) ; L42.4@192.4,-23.125 192.7,-23.125 193.825,-24.25 193.825,-26.109 193.5,-26.434 v1(193.5,-27) ; L41.4@192.4,-4.125 192.7,-4.125 193.9,-5.325 193.9,-7.6 v1(193.5,-8) ; L48.4@211.4,-61.125 211.7,-61.125 213,-62.425 213,-65 v1(212.5,-65.5) ; L47.4@211.4,-42.125 212.45,-42.125 212.9,-42.575 212.9,-45.6 v1(212.5,-46) ; L46.4@211.4,-23.125 211.7,-23.125 212.9,-24.325 212.9,-26.6 v1(212.5,-27) ; L45.4@211.4,-4.125 211.7,-4.125 212.9,-5.325 212.9,-7.6 v1(212.5,-8) ; L52.4@230.4,-61.125 230.7,-61.125 232,-62.425 232,-65 v1(231.5,-65.5) ; L51.4@230.4,-42.125 230.7,-42.125 232,-43.425 232,-45.5 v1(231.5,-46) ; L50.4@230.4,-23.125 230.7,-23.125 231.825,-24.25 231.825,-26.109 231.5,-26.434 v1(231.5,-27) ; L49.4@230.4,-4.125 230.7,-4.125 231.9,-5.325 231.9,-7.6 v1(231.5,-8) ; L56.4@249.4,-61.125 249.7,-61.125 250.9,-62.325 250.9,-65.1 v1(250.5,-65.5) ; L55.4@249.4,-42.125 249.7,-42.125 250.9,-43.325 250.9,-45.6 v1(250.5,-46) ; L54.4@249.4,-23.125 249.7,-23.125 251,-24.425 251,-26.5 250.9,-26.6 v1(250.5,-27) 252.08,-28.58 J1.1@253,-28.58 254.162,-28.58 257.525,-25.217 257.525,-7.525 255.4,-5.4 v1(255,-5) ; L53.4@249.4,-4.125 249.7,-4.125 250.9,-5.325 250.9,-7.542 250.871,-7.571 v1(250.471,-7.971)
  B.Cu w0.5: U1.21@0.15,7.62 0.15,4.35 2.925,1.575 2.925,-2.1 2.4,-2.625 L1.4@2.4,-3.625
pads on no net: SW1.Un1 SW1.Un2 SW1.Un3 SW2.Un1 SW2.Un2 SW2.Un3 SW3.Un1 SW3.Un2 SW3.Un3 SW3.Un4 SW3.Un5 SW4.Un1 SW4.Un2 SW4.Un3 SW4.Un4 SW4.Un5 SW5.Un1 SW5.Un2 SW5.Un3 SW5.Un4 SW5.Un5 SW6.Un1 SW6.Un2 SW6.Un3 SW6.Un4 SW6.Un5 SW7.Un1 SW7.Un2 SW7.Un3 SW7.Un4 SW7.Un5 SW8.Un1 SW8.Un2 SW8.Un3 SW8.Un4 SW8.Un5 SW9.Un1 SW9.Un2 SW9.Un3 SW9.Un4 SW9.Un5 SW10.Un1 SW10.Un2 SW10.Un3 SW10.Un4 SW10.Un5 SW11.Un1 SW11.Un2 SW11.Un3 SW11.Un4 SW11.Un5 SW12.Un1 SW12.Un2 SW12.Un3 SW12.Un4 SW12.Un5 SW13.Un1 SW13.Un2 SW13.Un3 SW13.Un4 SW13.Un5 SW14.Un1 SW14.Un2 SW14.Un3 SW14.Un4 SW14.Un5 SW15.Un1 SW15.Un2 SW15.Un3 SW15.Un4 SW15.Un5 SW16.Un1 SW16.Un2 SW16.Un3 SW16.Un4 SW16.Un5 SW17.Un1 SW17.Un2 SW17.Un3 SW17.Un4 SW17.Un5 SW18.Un1 SW18.Un2 SW18.Un3 SW18.Un4 SW18.Un5 SW19.Un1 SW19.Un2 SW19.Un3 SW19.Un4 SW19.Un5 SW20.Un1 SW20.Un2 SW20.Un3 SW20.Un4 SW20.Un5 SW21.Un1 SW21.Un2 SW21.Un3 SW21.Un4 SW21.Un5 SW22.Un1 SW22.Un2 SW22.Un3 SW22.Un4 SW22.Un5 SW23.Un1 SW23.Un2 SW23.Un3 SW23.Un4 SW23.Un5 SW24.Un1 SW24.Un2 SW24.Un3 SW24.Un4 SW24.Un5 SW25.Un1 SW25.Un2 SW25.Un3 SW25.Un4 SW25.Un5 SW26.Un1 SW26.Un2 SW26.Un3 SW26.Un4 SW26.Un5 SW27.Un1 SW27.Un2 SW27.Un3 SW27.Un4 SW27.Un5 SW28.Un1 SW28.Un2 SW28.Un3 SW28.Un4 SW28.Un5 SW29.Un1 SW29.Un2 SW29.Un3 SW29.Un4 SW29.Un5 SW30.Un1 SW30.Un2 SW30.Un3 SW30.Un4 SW30.Un5 SW31.Un1 SW31.Un2 SW31.Un3 SW31.Un4 SW31.Un5 SW32.Un1 SW32.Un2 SW32.Un3 SW32.Un4 SW32.Un5 SW33.Un1 SW33.Un2 SW33.Un3 SW33.Un4 SW33.Un5 SW34.Un1 SW34.Un2 SW34.Un3 SW34.Un4 SW34.Un5 SW35.Un1 SW35.Un2 SW35.Un3 SW35.Un4 SW35.Un5 SW36.Un1 SW36.Un2 SW36.Un3 SW36.Un4 SW36.Un5 SW37.Un1 SW37.Un2 SW37.Un3 SW37.Un4 SW37.Un5 SW38.Un1 SW38.Un2 SW38.Un3 SW38.Un4 SW38.Un5 SW39.Un1 SW39.Un2 SW39.Un3 SW39.Un4 SW39.Un5 SW40.Un1 SW40.Un2 SW40.Un3 SW40.Un4 SW40.Un5 SW41.Un1 SW41.Un2 SW41.Un3 SW41.Un4 SW41.Un5 SW42.Un1 SW42.Un2 SW42.Un3 SW42.Un4 SW42.Un5 SW43.Un1 SW43.Un2 SW43.Un3 SW43.Un4 SW43.Un5 SW44.Un1 SW44.Un2 SW44.Un3 SW44.Un4 SW44.Un5 SW45.Un1 SW45.Un2 SW45.Un3 SW45.Un4 SW45.Un5 SW46.Un1 SW46.Un2 SW46.Un3 SW46.Un4 SW46.Un5 SW47.Un1 SW47.Un2 SW47.Un3 SW47.Un4 SW47.Un5 SW48.Un1 SW48.Un2 SW48.Un3 SW48.Un4 SW48.Un5 SW49.Un1 SW49.Un2 SW49.Un3 SW49.Un4 SW49.Un5 SW50.Un1 SW50.Un2 SW50.Un3 SW50.Un4 SW50.Un5 SW51.Un1 SW51.Un2 SW51.Un3 SW51.Un4 SW51.Un5 SW52.Un1 SW52.Un2 SW52.Un3 SW52.Un4 SW52.Un5 SW53.Un1 SW53.Un2 SW53.Un3 SW53.Un4 SW53.Un5 SW54.Un1 SW54.Un2 SW54.Un3 SW54.Un4 SW54.Un5 SW55.Un1 SW55.Un2 SW55.Un3 SW55.Un4 SW55.Un5 SW56.Un1 SW56.Un2 SW56.Un3 SW56.Un4 SW56.Un5

## Polygon pours and split planes (outlines as drawn)
GND on F.Cu "F.Cu-GND" (solid, remove dead copper, pour order 0): 260,13 -13,13 -13,-74 260,-74
GND on B.Cu "B.Cu-GND" (solid, remove dead copper, pour order 1): 260.5,13.5 -13.5,13.5 -13.5,-74.5 260.5,-74.5

## Keep-outs
Edge.Cuts:
  lines w0.15: -1.75,-60.25 -1.75,-63.7 ccw(c-1.45,-63.7) -1.45,-64 1.45,-64 ccw(c1.45,-63.7) 1.75,-63.7 1.75,-60.25 ccw(c1.5,-60.25) 1.5,-60 -1.45,-60 ccw(c-1.45,-60.3) -1.747,-60.258 ; -1.75,-41.25 -1.75,-44.7 ccw(c-1.45,-44.7) -1.45,-45 1.45,-45 ccw(c1.45,-44.7) 1.75,-44.7 1.75,-41.25 ccw(c1.5,-41.25) 1.5,-41 -1.45,-41 ccw(c-1.45,-41.3) -1.747,-41.258 ; -1.75,-22.25 -1.75,-25.7 ccw(c-1.45,-25.7) -1.45,-26 1.45,-26 ccw(c1.45,-25.7) 1.75,-25.7 1.75,-22.25 ccw(c1.5,-22.25) 1.5,-22 -1.45,-22 ccw(c-1.45,-22.3) -1.747,-22.258 ; 17.25,-60.25 17.25,-63.7 ccw(c17.55,-63.7) 17.55,-64 20.45,-64 ccw(c20.45,-63.7) 20.75,-63.7 20.75,-60.25 ccw(c20.5,-60.25) 20.5,-60 17.55,-60 ccw(c17.55,-60.3) 17.253,-60.258 ; 17.25,-41.25 17.25,-44.7 ccw(c17.55,-44.7) 17.55,-45 20.45,-45 ccw(c20.45,-44.7) 20.75,-44.7 20.75,-41.25 ccw(c20.5,-41.25) 20.5,-41 17.55,-41 ccw(c17.55,-41.3) 17.253,-41.258 ; 17.25,-22.25 17.25,-25.7 ccw(c17.55,-25.7) 17.55,-26 20.45,-26 ccw(c20.45,-25.7) 20.75,-25.7 20.75,-22.25 ccw(c20.5,-22.25) 20.5,-22 17.55,-22 ccw(c17.55,-22.3) 17.253,-22.258 ; 17.25,-2.75 17.25,-6.2 ccw(c17.55,-6.2) 17.55,-6.5 20.45,-6.5 ccw(c20.45,-6.2) 20.75,-6.2 20.75,-2.75 ccw(c20.5,-2.75) 20.5,-2.5 17.55,-2.5 ccw(c17.55,-2.8) 17.253,-2.758 ; 36.25,-60.25 36.25,-63.7 ccw(c36.55,-63.7) 36.55,-64 39.45,-64 ccw(c39.45,-63.7) 39.75,-63.7 39.75,-60.25 ccw(c39.5,-60.25) 39.5,-60 36.55,-60 ccw(c36.55,-60.3) 36.253,-60.258 ; 36.25,-41.25 36.25,-44.7 ccw(c36.55,-44.7) 36.55,-45 39.45,-45 ccw(c39.45,-44.7) 39.75,-44.7 39.75,-41.25 ccw(c39.5,-41.25) 39.5,-41 36.55,-41 ccw(c36.55,-41.3) 36.253,-41.258 ; 36.25,-22.25 36.25,-25.7 ccw(c36.55,-25.7) 36.55,-26 39.45,-26 ccw(c39.45,-25.7) 39.75,-25.7 39.75,-22.25 ccw(c39.5,-22.25) 39.5,-22 36.55,-22 ccw(c36.55,-22.3) 36.253,-22.258 ; 36.25,-3.25 36.25,-6.7 ccw(c36.55,-6.7) 36.55,-7 39.45,-7 ccw(c39.45,-6.7) 39.75,-6.7 39.75,-3.25 ccw(c39.5,-3.25) 39.5,-3 36.55,-3 ccw(c36.55,-3.3) 36.253,-3.258 ; 55.25,-60.25 55.25,-63.7 ccw(c55.55,-63.7) 55.55,-64 58.45,-64 ccw(c58.45,-63.7) 58.75,-63.7 58.75,-60.25 ccw(c58.5,-60.25) 58.5,-60 55.55,-60 ccw(c55.55,-60.3) 55.253,-60.258 ; 55.25,-41.25 55.25,-44.7 ccw(c55.55,-44.7) 55.55,-45 58.45,-45 ccw(c58.45,-44.7) 58.75,-44.7 58.75,-41.25 ccw(c58.5,-41.25) 58.5,-41 55.55,-41 ccw(c55.55,-41.3) 55.253,-41.258 ; 55.25,-22.25 55.25,-25.7 ccw(c55.55,-25.7) 55.55,-26 58.45,-26 ccw(c58.45,-25.7) 58.75,-25.7 58.75,-22.25 ccw(c58.5,-22.25) 58.5,-22 55.55,-22 ccw(c55.55,-22.3) 55.253,-22.258 ; 55.25,-3.25 55.25,-6.7 ccw(c55.55,-6.7) 55.55,-7 58.45,-7 ccw(c58.45,-6.7) 58.75,-6.7 58.75,-3.25 ccw(c58.5,-3.25) 58.5,-3 55.55,-3 ccw(c55.55,-3.3) 55.253,-3.258 ; 74.25,-65.25 74.25,-68.7 ccw(c74.55,-68.7) 74.55,-69 77.45,-69 ccw(c77.45,-68.7) 77.75,-68.7 77.75,-65.25 ccw(c77.5,-65.25) 77.5,-65 74.55,-65 ccw(c74.55,-65.3) 74.253,-65.258 ; 74.25,-41.25 74.25,-44.7 ccw(c74.55,-44.7) 74.55,-45 77.45,-45 ccw(c77.45,-44.7) 77.75,-44.7 77.75,-41.25 ccw(c77.5,-41.25) 77.5,-41 74.55,-41 ccw(c74.55,-41.3) 74.253,-41.258 ; 74.25,-22.25 74.25,-25.7 ccw(c74.55,-25.7) 74.55,-26 77.45,-26 ccw(c77.45,-25.7) 77.75,-25.7 77.75,-22.25 ccw(c77.5,-22.25) 77.5,-22 74.55,-22 ccw(c74.55,-22.3) 74.253,-22.258 ; 74.25,-3.25 74.25,-6.7 ccw(c74.55,-6.7) 74.55,-7 77.45,-7 ccw(c77.45,-6.7) 77.75,-6.7 77.75,-3.25 ccw(c77.5,-3.25) 77.5,-3 74.55,-3 ccw(c74.55,-3.3) 74.253,-3.258 ; 93.25,-65.25 93.25,-68.7 ccw(c93.55,-68.7) 93.55,-69 96.45,-69 ccw(c96.45,-68.7) 96.75,-68.7 96.75,-65.25 ccw(c96.5,-65.25) 96.5,-65 93.55,-65 ccw(c93.55,-65.3) 93.253,-65.258 ; 93.25,-41.25 93.25,-44.7 ccw(c93.55,-44.7) 93.55,-45 96.45,-45 ccw(c96.45,-44.7) 96.75,-44.7 96.75,-41.25 ccw(c96.5,-41.25) 96.5,-41 93.55,-41 ccw(c93.55,-41.3) 93.253,-41.258 ; 93.25,-22.25 93.25,-25.7 ccw(c93.55,-25.7) 93.55,-26 96.45,-26 ccw(c96.45,-25.7) 96.75,-25.7 96.75,-22.25 ccw(c96.5,-22.25) 96.5,-22 93.55,-22 ccw(c93.55,-22.3) 93.253,-22.258 ; 93.25,-3.25 93.25,-6.7 ccw(c93.55,-6.7) 93.55,-7 96.45,-7 ccw(c96.45,-6.7) 96.75,-6.7 96.75,-3.25 ccw(c96.5,-3.25) 96.5,-3 93.55,-3 ccw(c93.55,-3.3) 93.253,-3.258 ; 112.25,-65.25 112.25,-68.7 ccw(c112.55,-68.7) 112.55,-69 115.45,-69 ccw(c115.45,-68.7) 115.75,-68.7 115.75,-65.25 ccw(c115.5,-65.25) 115.5,-65 112.55,-65 ccw(c112.55,-65.3) 112.253,-65.258 ; 112.25,-41.25 112.25,-44.7 ccw(c112.55,-44.7) 112.55,-45 115.45,-45 ccw(c115.45,-44.7) 115.75,-44.7 115.75,-41.25 ccw(c115.5,-41.25) 115.5,-41 112.55,-41 ccw(c112.55,-41.3) 112.253,-41.258 ; 112.25,-22.25 112.25,-25.7 ccw(c112.55,-25.7) 112.55,-26 115.45,-26 ccw(c115.45,-25.7) 115.75,-25.7 115.75,-22.25 ccw(c115.5,-22.25) 115.5,-22 112.55,-22 ccw(c112.55,-22.3) 112.253,-22.258 ; 131.25,-65.25 131.25,-68.7 ccw(c131.55,-68.7) 131.55,-69 134.45,-69 ccw(c134.45,-68.7) 134.75,-68.7 134.75,-65.25 ccw(c134.5,-65.25) 134.5,-65 131.55,-65 ccw(c131.55,-65.3) 131.253,-65.258 ; 131.25,-41.25 131.25,-44.7 ccw(c131.55,-44.7) 131.55,-45 134.45,-45 ccw(c134.45,-44.7) 134.75,-44.7 134.75,-41.25 ccw(c134.5,-41.25) 134.5,-41 131.55,-41 ccw(c131.55,-41.3) 131.253,-41.258 ; 131.25,-22.25 131.25,-25.7 ccw(c131.55,-25.7) 131.55,-26 134.45,-26 ccw(c134.45,-25.7) 134.75,-25.7 134.75,-22.25 ccw(c134.5,-22.25) 134.5,-22 131.55,-22 ccw(c131.55,-22.3) 131.253,-22.258 ; 131.25,-3.25 131.25,-6.7 ccw(c131.55,-6.7) 131.55,-7 134.45,-7 ccw(c134.45,-6.7) 134.75,-6.7 134.75,-3.25 ccw(c134.5,-3.25) 134.5,-3 131.55,-3 ccw(c131.55,-3.3) 131.253,-3.258 ; 150.25,-65.25 150.25,-68.7 ccw(c150.55,-68.7) 150.55,-69 153.45,-69 ccw(c153.45,-68.7) 153.75,-68.7 153.75,-65.25 ccw(c153.5,-65.25) 153.5,-65 150.55,-65 ccw(c150.55,-65.3) 150.253,-65.258 ; 150.25,-41.25 150.25,-44.7 ccw(c150.55,-44.7) 150.55,-45 153.45,-45 ccw(c153.45,-44.7) 153.75,-44.7 153.75,-41.25 ccw(c153.5,-41.25) 153.5,-41 150.55,-41 ccw(c150.55,-41.3) 150.253,-41.258 ; 150.25,-22.25 150.25,-25.7 ccw(c150.55,-25.7) 150.55,-26 153.45,-26 ccw(c153.45,-25.7) 153.75,-25.7 153.75,-22.25 ccw(c153.5,-22.25) 153.5,-22 150.55,-22 ccw(c150.55,-22.3) 150.253,-22.258 ; 150.25,-3.25 150.25,-6.7 ccw(c150.55,-6.7) 150.55,-7 153.45,-7 ccw(c153.45,-6.7) 153.75,-6.7 153.75,-3.25 ccw(c153.5,-3.25) 153.5,-3 150.55,-3 ccw(c150.55,-3.3) 150.253,-3.258 ; 169.25,-65.25 169.25,-68.7 ccw(c169.55,-68.7) 169.55,-69 172.45,-69 ccw(c172.45,-68.7) 172.75,-68.7 172.75,-65.25 ccw(c172.5,-65.25) 172.5,-65 169.55,-65 ccw(c169.55,-65.3) 169.253,-65.258 ; 169.25,-41.25 169.25,-44.7 ccw(c169.55,-44.7) 169.55,-45 172.45,-45 ccw(c172.45,-44.7) 172.75,-44.7 172.75,-41.25 ccw(c172.5,-41.25) 172.5,-41 169.55,-41 ccw(c169.55,-41.3) 169.253,-41.258 ; 169.25,-22.25 169.25,-25.7 ccw(c169.55,-25.7) 169.55,-26 172.45,-26 ccw(c172.45,-25.7) 172.75,-25.7 172.75,-22.25 ccw(c172.5,-22.25) 172.5,-22 169.55,-22 ccw(c169.55,-22.3) 169.253,-22.258 ; 169.25,-3.25 169.25,-6.7 ccw(c169.55,-6.7) 169.55,-7 172.45,-7 ccw(c172.45,-6.7) 172.75,-6.7 172.75,-3.25 ccw(c172.5,-3.25) 172.5,-3 169.55,-3 ccw(c169.55,-3.3) 169.253,-3.258 ; 188.25,-60.25 188.25,-63.7 ccw(c188.55,-63.7) 188.55,-64 191.45,-64 ccw(c191.45,-63.7) 191.75,-63.7 191.75,-60.25 ccw(c191.5,-60.25) 191.5,-60 188.55,-60 ccw(c188.55,-60.3) 188.253,-60.258 ; 188.25,-41.25 188.25,-44.7 ccw(c188.55,-44.7) 188.55,-45 191.45,-45 ccw(c191.45,-44.7) 191.75,-44.7 191.75,-41.25 ccw(c191.5,-41.25) 191.5,-41 188.55,-41 ccw(c188.55,-41.3) 188.253,-41.258 ; 188.25,-22.25 188.25,-25.7 ccw(c188.55,-25.7) 188.55,-26 191.45,-26 ccw(c191.45,-25.7) 191.75,-25.7 191.75,-22.25 ccw(c191.5,-22.25) 191.5,-22 188.55,-22 ccw(c188.55,-22.3) 188.253,-22.258 ; 188.25,-3.25 188.25,-6.7 ccw(c188.55,-6.7) 188.55,-7 191.45,-7 ccw(c191.45,-6.7) 191.75,-6.7 191.75,-3.25 ccw(c191.5,-3.25) 191.5,-3 188.55,-3 ccw(c188.55,-3.3) 188.253,-3.258 ; 207.25,-60.25 207.25,-63.7 ccw(c207.55,-63.7) 207.55,-64 210.45,-64 ccw(c210.45,-63.7) 210.75,-63.7 210.75,-60.25 ccw(c210.5,-60.25) 210.5,-60 207.55,-60 ccw(c207.55,-60.3) 207.253,-60.258 ; 207.25,-41.25 207.25,-44.7 ccw(c207.55,-44.7) 207.55,-45 210.45,-45 ccw(c210.45,-44.7) 210.75,-44.7 210.75,-41.25 ccw(c210.5,-41.25) 210.5,-41 207.55,-41 ccw(c207.55,-41.3) 207.253,-41.258 ; 207.25,-22.25 207.25,-25.7 ccw(c207.55,-25.7) 207.55,-26 210.45,-26 ccw(c210.45,-25.7) 210.75,-25.7 210.75,-22.25 ccw(c210.5,-22.25) 210.5,-22 207.55,-22 ccw(c207.55,-22.3) 207.253,-22.258 ; 207.25,-3.25 207.25,-6.7 ccw(c207.55,-6.7) 207.55,-7 210.45,-7 ccw(c210.45,-6.7) 210.75,-6.7 210.75,-3.25 ccw(c210.5,-3.25) 210.5,-3 207.55,-3 ccw(c207.55,-3.3) 207.253,-3.258 ; 226.25,-60.25 226.25,-63.7 ccw(c226.55,-63.7) 226.55,-64 229.45,-64 ccw(c229.45,-63.7) 229.75,-63.7 229.75,-60.25 ccw(c229.5,-60.25) 229.5,-60 226.55,-60 ccw(c226.55,-60.3) 226.253,-60.258 ; 226.25,-41.25 226.25,-44.7 ccw(c226.55,-44.7) 226.55,-45 229.45,-45 ccw(c229.45,-44.7) 229.75,-44.7 229.75,-41.25 ccw(c229.5,-41.25) 229.5,-41 226.55,-41 ccw(c226.55,-41.3) 226.253,-41.258 ; 226.25,-22.25 226.25,-25.7 ccw(c226.55,-25.7) 226.55,-26 229.45,-26 ccw(c229.45,-25.7) 229.75,-25.7 229.75,-22.25 ccw(c229.5,-22.25) 229.5,-22 226.55,-22 ccw(c226.55,-22.3) 226.253,-22.258 ; 226.25,-3.25 226.25,-6.7 ccw(c226.55,-6.7) 226.55,-7 229.45,-7 ccw(c229.45,-6.7) 229.75,-6.7 229.75,-3.25 ccw(c229.5,-3.25) 229.5,-3 226.55,-3 ccw(c226.55,-3.3) 226.253,-3.258 ; 245.25,-60.25 245.25,-63.7 ccw(c245.55,-63.7) 245.55,-64 248.45,-64 ccw(c248.45,-63.7) 248.75,-63.7 248.75,-60.25 ccw(c248.5,-60.25) 248.5,-60 245.55,-60 ccw(c245.55,-60.3) 245.253,-60.258 ; 245.25,-41.25 245.25,-44.7 ccw(c245.55,-44.7) 245.55,-45 248.45,-45 ccw(c248.45,-44.7) 248.75,-44.7 248.75,-41.25 ccw(c248.5,-41.25) 248.5,-41 245.55,-41 ccw(c245.55,-41.3) 245.253,-41.258 ; 245.25,-22.25 245.25,-25.7 ccw(c245.55,-25.7) 245.55,-26 248.45,-26 ccw(c248.45,-25.7) 248.75,-25.7 248.75,-22.25 ccw(c248.5,-22.25) 248.5,-22 245.55,-22 ccw(c245.55,-22.3) 245.253,-22.258 ; 245.25,-3.25 245.25,-6.7 ccw(c245.55,-6.7) 245.55,-7 248.45,-7 ccw(c248.45,-6.7) 248.75,-6.7 248.75,-3.25 ccw(c248.5,-3.25) 248.5,-3 245.55,-3 ccw(c245.55,-3.3) 245.253,-3.258 ; -12.5,-70.5 ccw(c-9.5,-70.5) -9.5,-73.5 ; -12.5,-70.5 ccw(c-9.5,-70.5) -9.5,-73.5 ; -12.5,-70.5 -12.5,9.5 ; -12.5,-70.5 -12.5,9.5 ; -12.5,9.5 cw(c-9.5,9.5) -9.5,12.5 ; -12.5,9.5 cw(c-9.5,9.5) -9.5,12.5 ; -9.5,-73.5 256.5,-73.5 ; -9.5,-73.5 256.5,-73.5 ; -9.5,12.5 256.5,12.5 ; -9.5,12.5 256.5,12.5 ; -1.75,-6.2 ccw(c-1.45,-6.2) -1.45,-6.5 ; -1.75,-6.2 ccw(c-1.45,-6.2) -1.45,-6.5 ; -1.75,-6.2 -1.75,-2.75 ; -1.75,-6.2 -1.75,-2.75 ; -1.75,-2.75 -1.747,-2.758 ; -1.747,-2.758 cw(c-1.45,-2.8) -1.45,-2.5 ; -1.747,-2.758 cw(c-1.45,-2.8) -1.45,-2.5 ; -1.45,-6.5 1.45,-6.5 ; -1.45,-6.5 1.45,-6.5 ; -1.45,-2.5 1.5,-2.5 ; -1.45,-2.5 1.5,-2.5 ; 1.45,-6.5 ccw(c1.45,-6.2) 1.75,-6.2 ; 1.45,-6.5 ccw(c1.45,-6.2) 1.75,-6.2 ; 1.5,-2.5 cw(c1.5,-2.75) 1.75,-2.75 ; 1.5,-2.5 cw(c1.5,-2.75) 1.75,-2.75 ; 1.75,-6.2 1.75,-2.75 ; 1.75,-6.2 1.75,-2.75 ; 112.25,-6.7 ccw(c112.55,-6.7) 112.55,-7 ; 112.25,-6.7 ccw(c112.55,-6.7) 112.55,-7 ; 112.25,-6.7 112.25,-3.25 ; 112.25,-6.7 112.25,-3.25 ; 112.25,-3.25 112.253,-3.258 ; 112.253,-3.258 cw(c112.55,-3.3) 112.55,-3 ; 112.253,-3.258 cw(c112.55,-3.3) 112.55,-3 ; 112.55,-7 115.45,-7 ; 112.55,-7 115.45,-7 ; 112.55,-3 115.5,-3 ; 112.55,-3 115.5,-3 ; 115.45,-7 ccw(c115.45,-6.7) 115.75,-6.7 ; 115.45,-7 ccw(c115.45,-6.7) 115.75,-6.7 ; 115.5,-3 cw(c115.5,-3.25) 115.75,-3.25 ; 115.5,-3 cw(c115.5,-3.25) 115.75,-3.25 ; 115.75,-6.7 115.75,-3.25 ; 115.75,-6.7 115.75,-3.25 ; 256.5,-73.5 ccw(c256.5,-70.5) 259.5,-70.5 ; 256.5,-73.5 ccw(c256.5,-70.5) 259.5,-70.5 ; 256.5,12.5 cw(c256.5,9.5) 259.5,9.5 ; 256.5,12.5 cw(c256.5,9.5) 259.5,9.5 ; 259.5,-70.5 259.5,9.5 ; 259.5,-70.5 259.5,9.5

## Silkscreen, mask and mechanical layers (free items; w line width, h text height)
F.SilkS:
  text "QOL56 @eswai 2019" at 24.461,-71.04 h1.5
B.SilkS:
  text "GND" at 257.489,-23.785 h1
  text "Din" at 256.851,-26.281 h1
  text "+5V" at 257.518,-28.782 h1
  text "56" at 208.031,-68.564 h2
  text "QOL" at 218.373,-70.345 h4
  text "@eswai 2019.03" at 195.646,-70.54 h1.5
Dwgs.User:
  drawing of 453 lines, arcs and shapes, not listed

## Dimensions
260,-73.5 to 260,12.5 on Dwgs.User
-12.5,-74 to 259.5,-74 on Dwgs.User
-13.5,-15.5 to -13.5,12.5 on Dwgs.User

## Text inside footprints (layer, text, board x,y; h text height)
SW1: Dwgs.User "1.00u" at -6.622,-8.689 h1.52
SW2: Dwgs.User "1.00u" at 12.378,-8.689 h1.52
U1: F.SilkS "B2" at 18.153,10.25 h0.8 r90; F.SilkS "F7" at 10.535,10.267 h0.8 r90; F.SilkS "F6" at 7.995,10.265 h0.8 r90; F.SilkS "F5" at 5.455,10.271 h0.8 r90; F.SilkS "RAW" at -7.244,10.296 h0.8 r90; F.SilkS "GND" at -4.703,10.321 h0.8 r90; F.SilkS "VCC" at 0.377,10.393 h0.8 r90; F.SilkS "F4" at 2.913,10.266 h0.8 r90; F.SilkS "B1" at 13.071,10.279 h0.8 r90; F.SilkS "B3" at 15.618,10.255 h0.8 r90; F.SilkS "B6" at 20.695,10.245 h0.8 r90; F.SilkS "B5" at 20.695,-10.671 h0.8 r90; F.SilkS "B4" at 18.153,-10.676 h0.8 r90; F.SilkS "E6" at 15.615,-10.67 h0.8 r90; F.SilkS "D7" at 13.075,-10.686 h0.8 r90; F.SilkS "C6" at 10.538,-10.669 h0.8 r90; F.SilkS "D4" at 7.993,-10.688 h0.8 r90; F.SilkS "GND" at -2.163,-11.201 h0.8 r90; F.SilkS "GND" at 0.377,-11.201 h0.8 r90; F.SilkS "D1" at 2.911,-10.655 h0.8 r90; F.SilkS "D0" at 5.458,-10.689 h0.8 r90; F.SilkS "D2" at -4.707,-10.684 h0.8 r90; F.SilkS "TX0/D3" at -7.242,-12.539 h0.8 r90; F.SilkS "RST" at -2.103,10.417 h0.8 r90; B.SilkS "D2" at -4.707,-10.238 h0.8 r90; B.SilkS "D0" at 5.458,-10.233 h0.8 r90; B.SilkS "D1" at 2.911,-10.267 h0.8 r90; B.SilkS "GND" at 0.377,-10.421 h0.8 r90; B.SilkS "GND" at -2.163,-10.421 h0.8 r90; B.SilkS "D4" at 7.993,-10.234 h0.8 r90; B.SilkS "C6" at 10.538,-10.253 h0.8 r90; B.SilkS "D7" at 13.075,-10.236 h0.8 r90; B.SilkS "E6" at 15.615,-10.252 h0.8 r90; B.SilkS "B4" at 18.153,-10.246 h0.8 r90; B.SilkS "B5" at 20.695,-10.251 h0.8 r90; B.SilkS "B6" at 20.695,10.677 h0.8 r90; B.SilkS "B3" at 15.618,10.667 h0.8 r90; B.SilkS "B1" at 13.071,10.643 h0.8 r90; B.SilkS "F4" at 2.913,10.656 h0.8 r90; B.SilkS "VCC" at 0.377,11.029 h0.8 r90; B.SilkS "GND" at -4.703,11.101 h0.8 r90; B.SilkS "RAW" at -7.244,11.126 h0.8 r90; B.SilkS "F5" at 5.455,10.651 h0.8 r90; B.SilkS "F6" at 7.995,10.657 h0.8 r90; B.SilkS "F7" at 10.535,10.655 h0.8 r90; B.SilkS "B2" at 18.153,10.672 h0.8 r90; B.SilkS "TX0/D3" at -7.242,-11.204 h0.8 r90; B.SilkS "RST" at -2.103,11.005 h0.8 r90